# Altium PCB Relay via transistor.PcbDoc
Units mm, origin at the board's own origin, x right, y up, seen from the top; angles counter-clockwise.
Board outline 152.4 x 101.6 mm, 2 copper layers (Top Layer, Bottom Layer); 6 components, 6 nets, 16 pads, 2 vias.
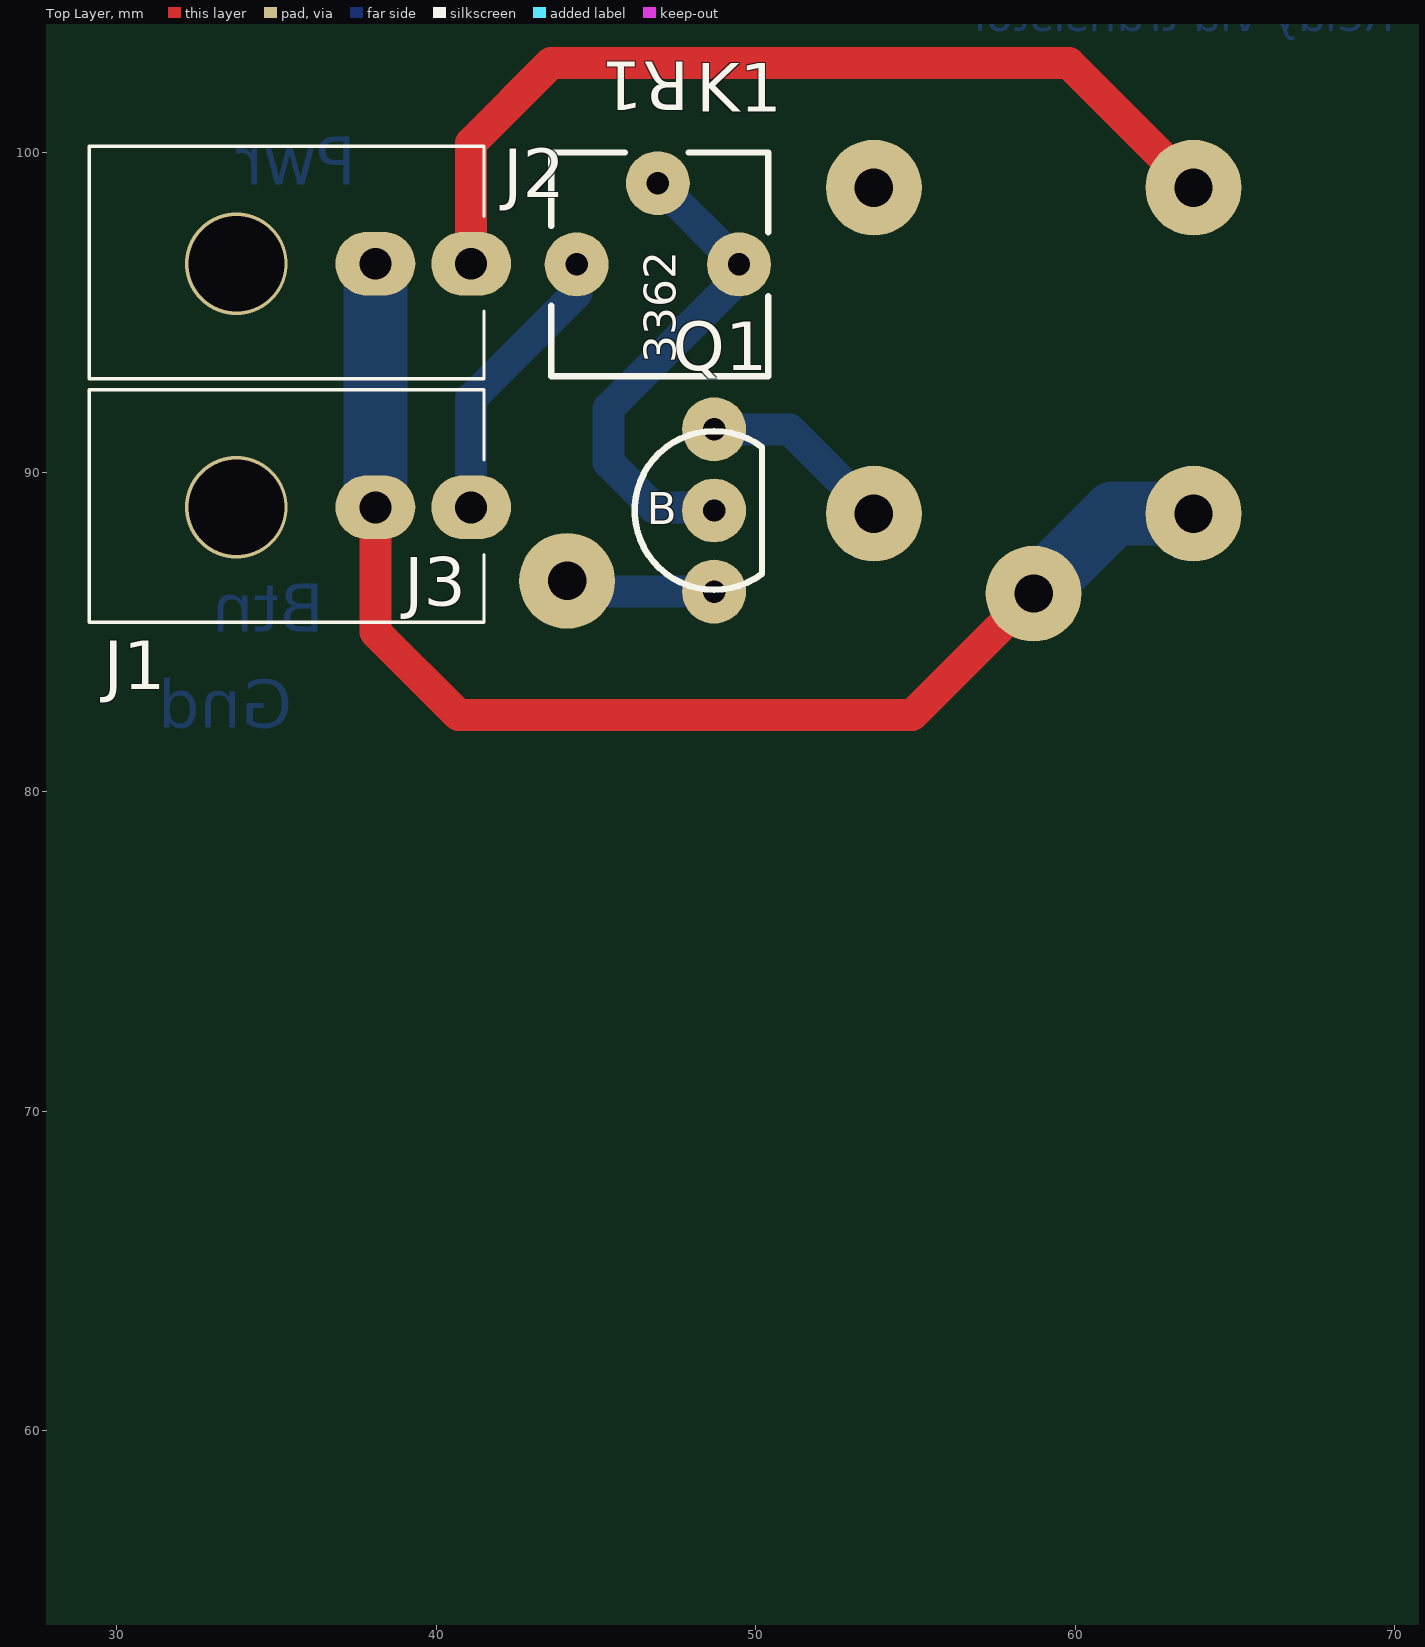
[diagram p0: Top Layer view]
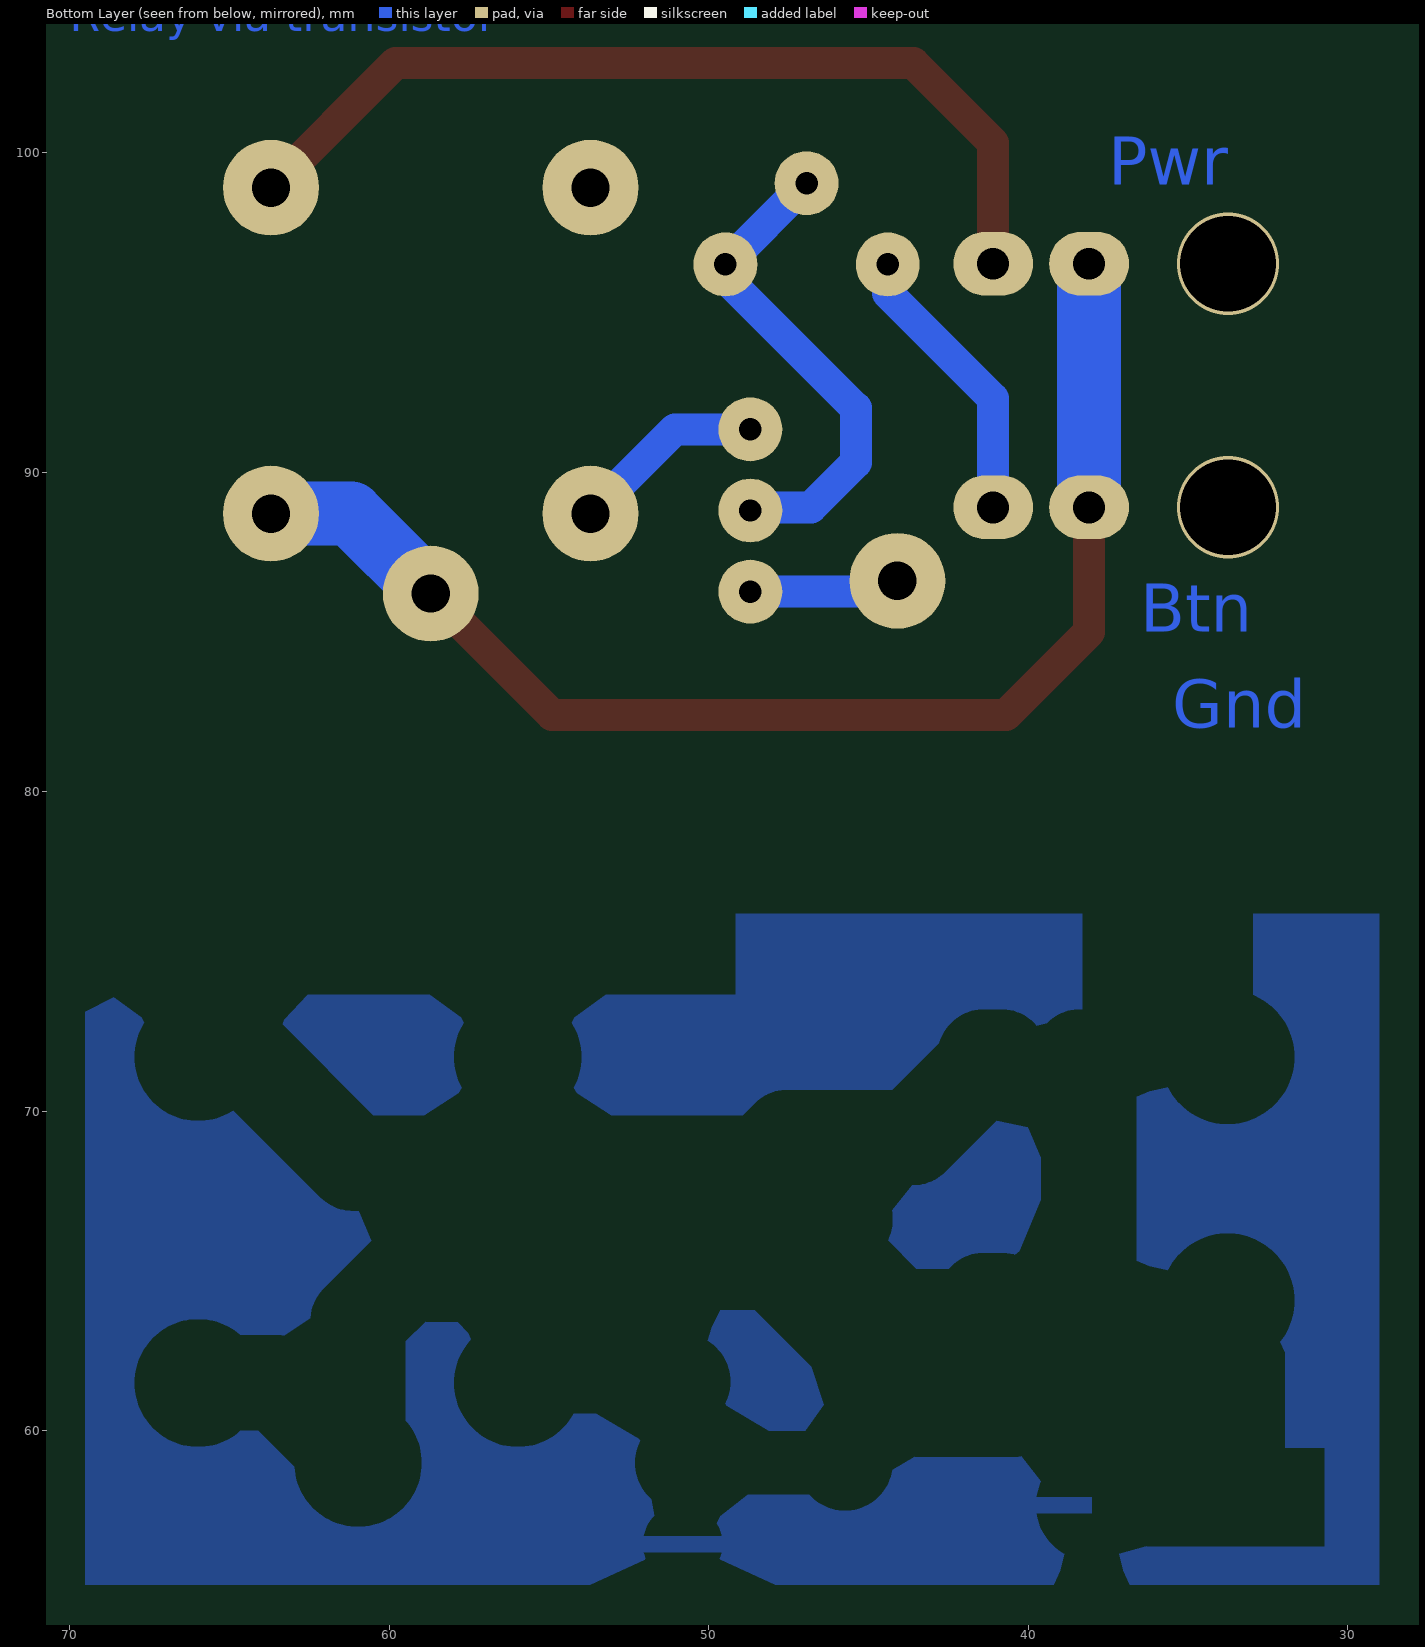
[diagram p1: Bottom Layer view, seen from below]
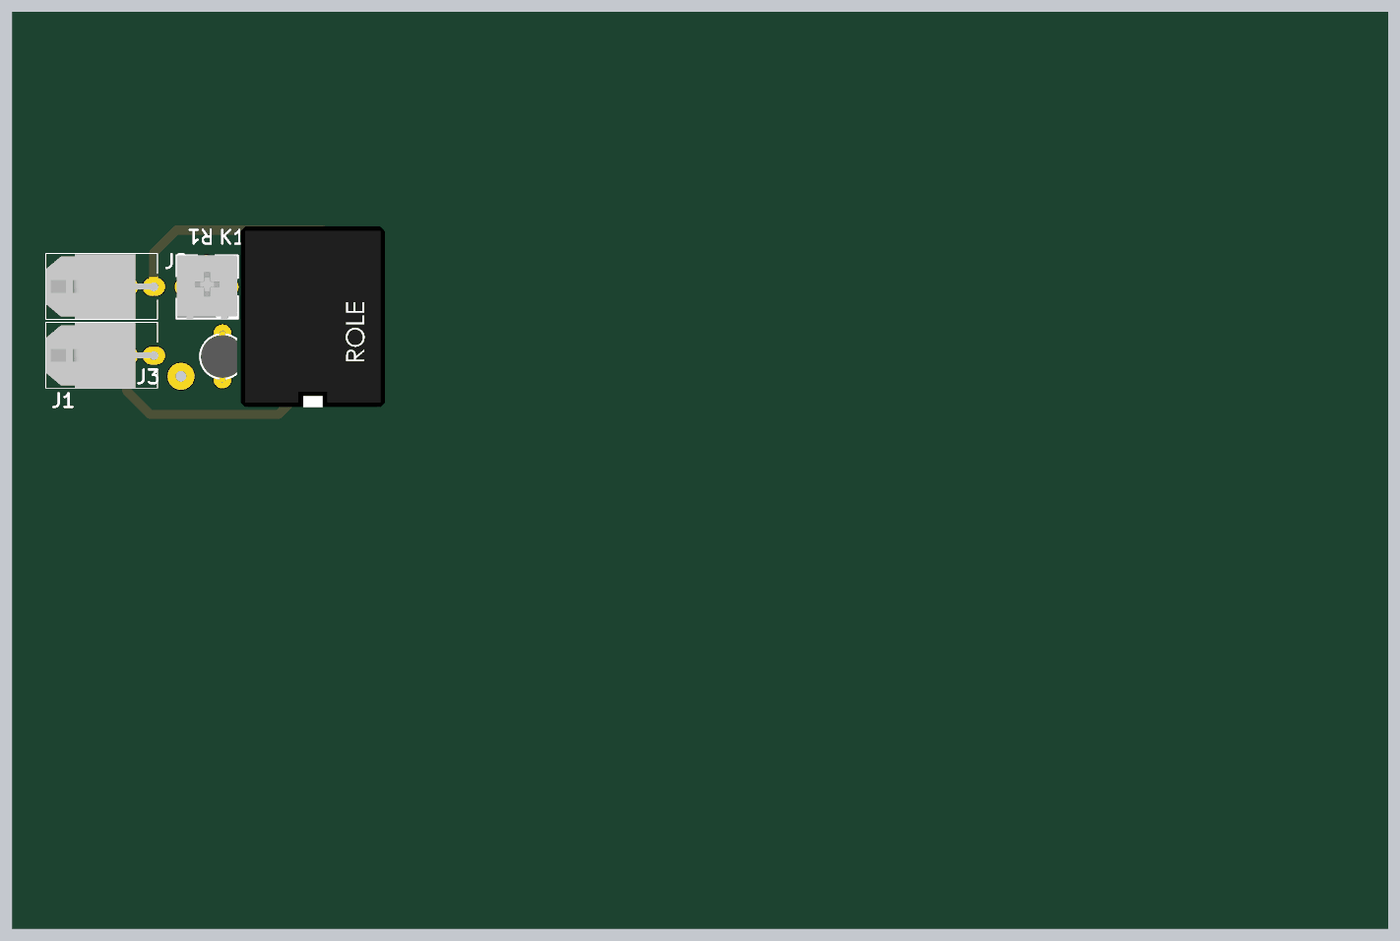
[diagram p2: 3D render of the assembled board from above, using the file's embedded part models]

## Layer stack, top to bottom
Top Solder: solder mask 0.0102, Solder Resist, Dk 3.5
Top Layer: signal copper 0.0356
Dielectric 1: dielectric 0.32, FR-4, Dk 4.8
Bottom Layer: signal copper 0.0356
Bottom Solder: solder mask 0.0102, Solder Resist, Dk 3.5

## Board outline
25.4,25.4 177.8,25.4 177.8,127 25.4,127

## Design rules (kind name [scope] priority, off if disabled: settings)
Clearance [All] p1: gap=0.5
PlaneConnect [All] p1: planeconnectstyle=Relief reliefexpansion=0.508 reliefentries=4 reliefconductorwidth=0.5 reliefairgap=0.254
PolygonConnect [All] p1: connectstyle=Relief reliefconductorwidth=0.5 reliefentries=4 polygonreliefangle="90 Angle" airgapwidth=0.254
RoutingVias [All] p1: holewidth=0.711 width=1.27 viastyle="Through Hole" minholewidth=0.711 minwidth=1.27 maxholewidth=0.711 maxwidth=1.27
SolderMaskExpansion [All] p1: expansion=0.102
Width [All] p1: maxlimit=2 minlimit=0.5 preferedwidth=1
28 further rules are at their usual default settings.

## Components (designator, comment, footprint, x,y, rotation, side; value= is the part's Value field where it differs from the comment)
J1 "Button" "Molex Micro-Fit 3.0 - 2 pin D R" 38.1,88.9 r270 top
J2 "Lock" "Molex Micro-Fit 3.0 - 2 pin D R" 38.1,96.52 r270 top
J3 "GND" "OnePin 1.2x3" 44.1,86.6 r0 top
K1 "SRA-12VDC-CL" SRA-12VDC-CL 58.7,86.2 r90 top
Q1 "NPN" "TO-92 2.54 (EBC)" 48.7,88.8 r0 top
R1 "10КOm" "Res Adj 3362P" 44.4,96.5 r90 top

## Footprints (in the part's own frame and the unit in brackets; to place one, negate y for a bottom-side part, rotate by r counter-clockwise, add the part's x,y. Pads: shape width x height; smd on the part's side, far side on the other; paste and mask are expansions set on the pad)
"Molex Micro-Fit 3.0 - 2 pin D R" [mm]
  oval 2x2.5 hole 1: 1(0,0) 2(0,3)
  silkscreen extent -3.67,-8.95 3.6,3.4, body extent -3.6,-8.95 3.55,3.3, height 8.83
"OnePin 1.2x3" [mm]
  round 3 hole 1.2: 1(0,0)
"Res Adj 3362P" [mm]
  round 2 hole 0.7: 1(0,0) 2(2.54,-2.54) 3(0,-5.08)
  silkscreen extent -3.5,-6 3.5,0.8, body extent -3.54,-5.95 3.5,0.75, height 4.69
SRA-12VDC-CL [mm]
  round 3 hole 1.2: 1(12.7,5) 2(0,0) 3(12.7,-5) 4(2.5,-5) 5(2.5,5)
  body extent -3,-8 17,8, height 15
"TO-92 2.54 (EBC)" [mm] "TO, Flat Index; 3 In-Line, Axial Leads; Body Dia. 4.5mm; Leads 0.51 x 0.48 mm (max)"
  round 2 hole 0.7: B(0,0) C(0,2.54) E(0,-2.54)
  silkscreen extent -2.48,-2.48 1.5,2.48, body extent -2.37,-2.79 1.6,2.79, height 5.7

## Part data
J1 J2: library part "Micro-Fit 2R (1x2)", "Horisontal, Dbl line, Male - 3mm"
J3: library part "OnePin Connector", "Only pad"
K1: "Single-Pole Dual-Throw Relay"
Q1: "NPN Bipolar Transistor"
R1: library part "Res Adj 3362"

## Via types
v1: diameter 3.2, hole 3, Top Layer to Bottom Layer, 2 vias

## Nets (pads, with @x,y where several pads share a name; then routed paths per layer and width w, separated by ;. In a path a pad name is that pad's centre, name@x,y a point inside that pad or via, vN(x,y) a via of type N, cw(c..) or ccw(c..) an arc to the next point about the centre after c; other vN are vias at no path point)
GND: J3.1 Q1.E | length 4.7
  Bottom Layer w1: J3.1 44.44,86.26 Q1.E
NetJ1_2: J1.2 R1.1 | length 9
  Bottom Layer w1: J1.2 41.1,92.3 44.4,95.6 R1.1
NetJ2_2: J2.2 K1.3 | length 29
  Top Layer w1: J2.2 41.1,100.3 43.6,102.8 59.8,102.8 K1.3
NetK1_5: K1.5 Q1.C | length 6.1
  Bottom Layer w1: Q1.C 51.06,91.34 K1.5
NetQ1_B: Q1.B R1.2 R1.3 | length 15.1
  Bottom Layer w1: R1.2 R1.3 ; Q1.B@48.26,88.9 46.8,88.9 45.4,90.3 45.4,92 R1.3@49.92,96.52
VCC: J1.1 J2.1 K1.2 K1.4 | length 40.8
  Top Layer w1: J1.1 38.1,85 40.7,82.4 54.9,82.4 K1.2
  Bottom Layer w2: J1.1 J2.1 ; K1.2 61.2,88.7 K1.4
pads on no net: K1.1
copper on no net:
  other v1: 33.75,88.9 33.75,96.52

## Polygon pours and split planes (outlines as drawn)
GND on Bottom Layer "Top Layer-No Net" (solid, pour order 2): 29.017,76.179 69.517,76.179 69.517,55.179 29.017,55.179

## Other copper
Bottom Layer:
  text "Relay via transistor" at 70,103.8 h1
  text "Pwr" at 37.5,99 h1.5
  text "Btn" at 36.5,85 h1.5
  text "Gnd" at 35.5,82 h1.5

## Text inside footprints (layer, text, board x,y; h text height)
Q1: Top Overlay "B" at 46.6,88.375 h1
R1: Top Overlay "3362" at 47.5,93.4 h1 r90